# EAGLE board resourciboard - IO (EAGLE 9.6.2)
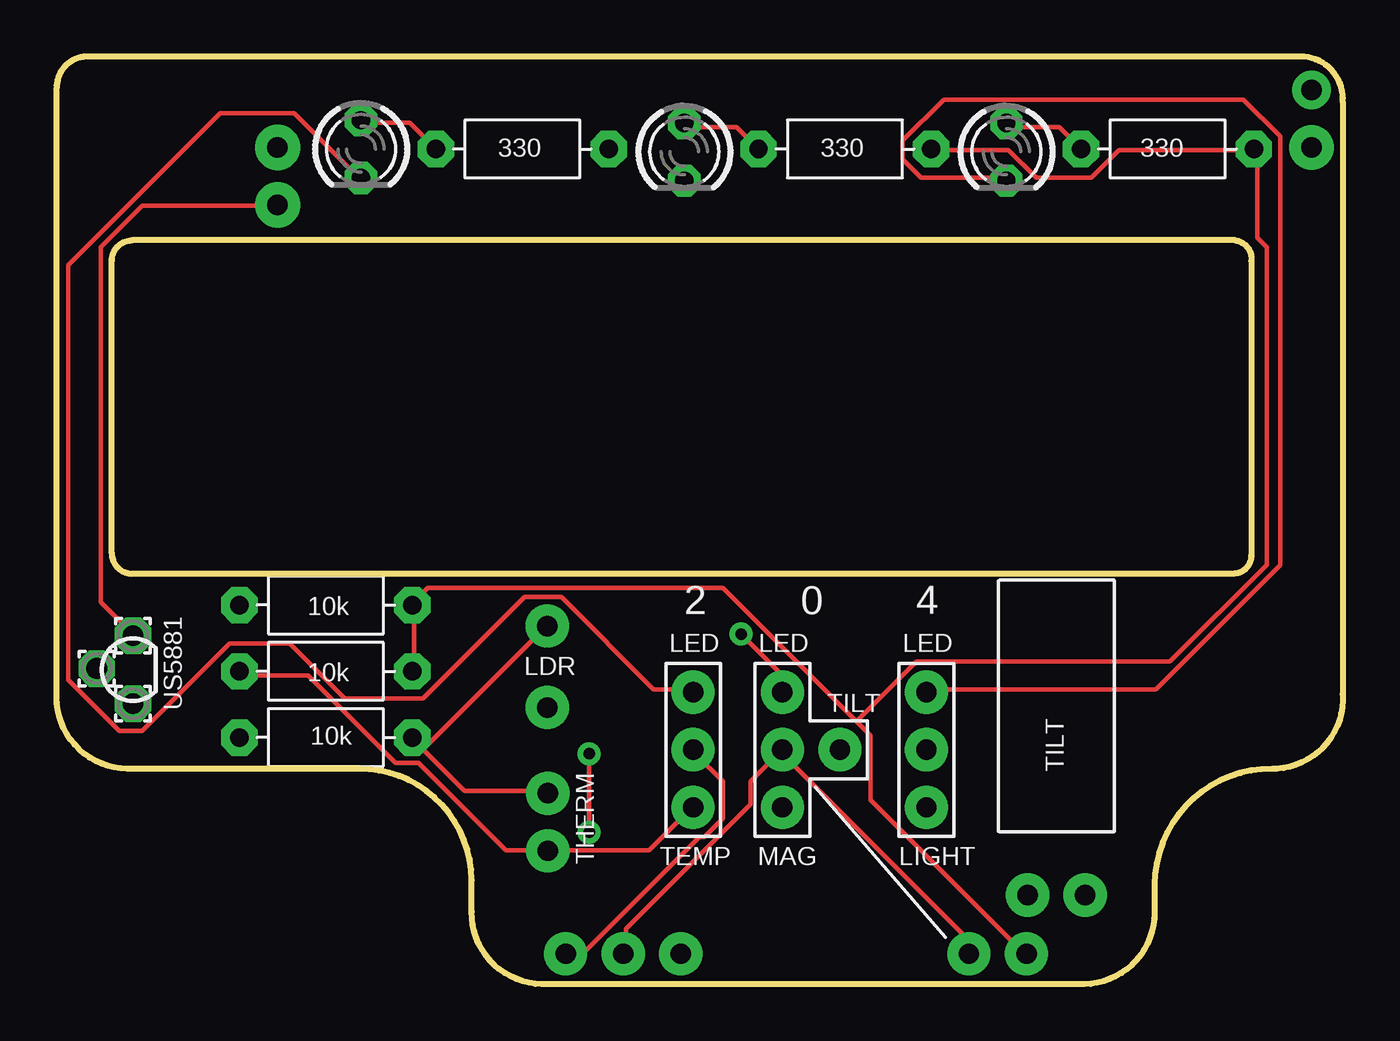
[diagram p0: board, top side]
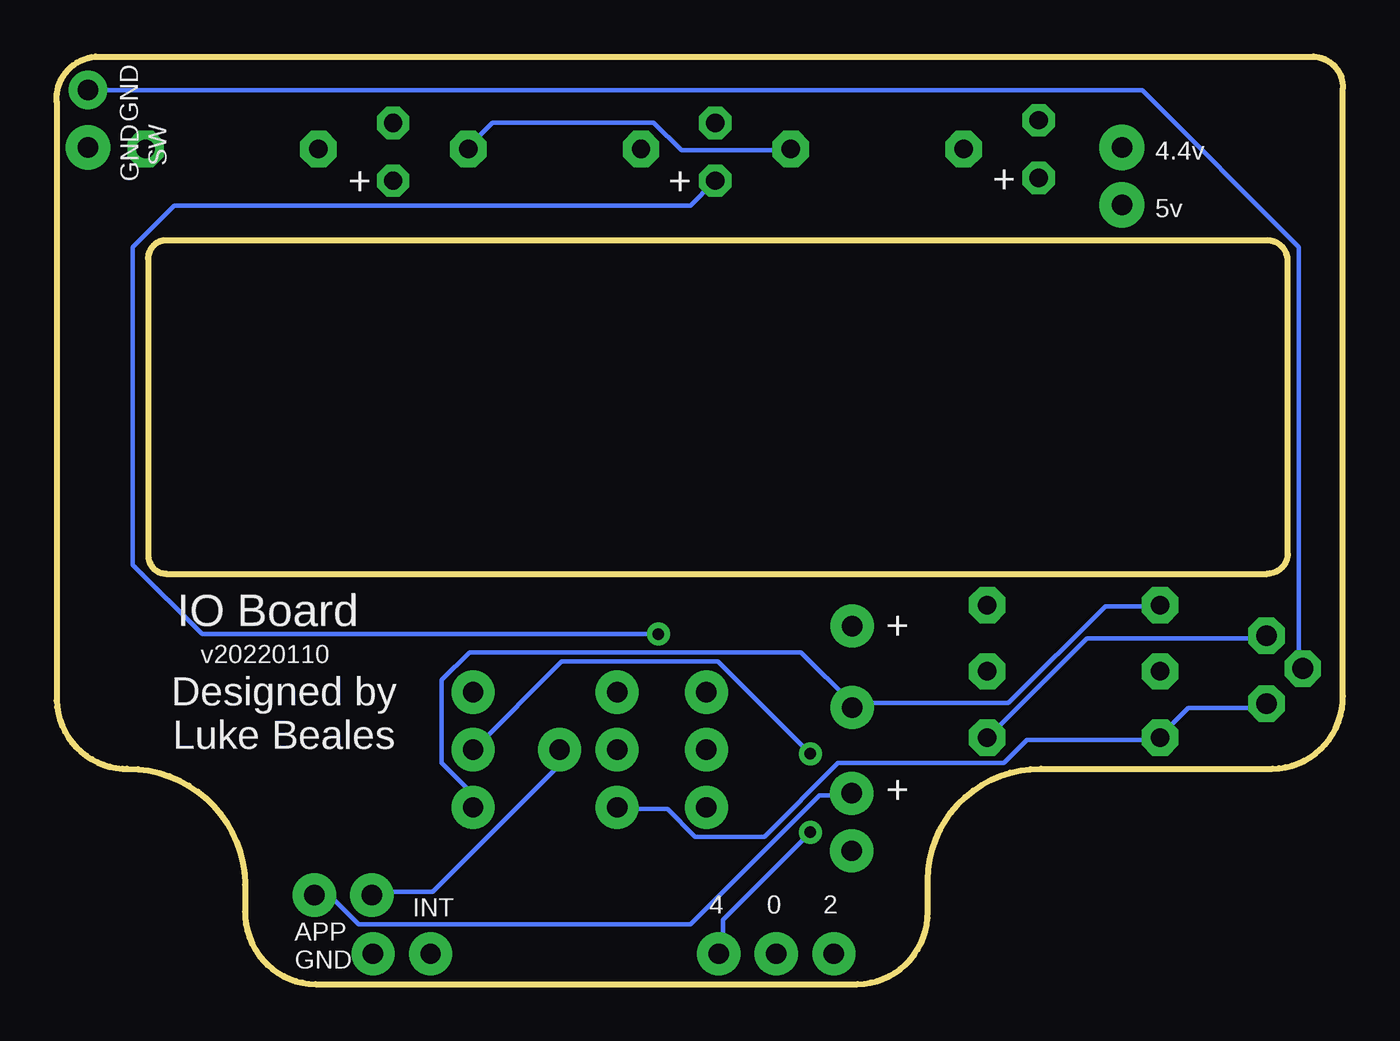
[diagram p1: board, bottom side, seen from below]

Size 56.71 x 40.9 mm. Coordinates in mm from the lower left corner, seen from the top.
Outline: 56.7,38.9 56.7,12.8 arc-90 53.8,9.5 53.6,9.5 arc90 48.4,4.4 48.4,3.2 arc-90 45.3,0 21.4,0 arc-90 18.3,3.2 18.3,4.6 arc90 13.3,9.5 3.1,9.5 arc-90 0,12.7 0,39.5 arc-90 1.3,40.9 55,40.9 arc-90 56.7,38.9
Outline: 51.97,32.8 arc-90 52.67,31.9 52.67,18.9 arc-90 51.87,18.1 3.33,18.1 arc-90 2.43,19 2.43,31.9 arc-90 3.33,32.8 51.97,32.8
Copper layers (1*16): Top 0.035mm / dielectric 1.5mm / Bottom 0.035mm
Design rules "SparkFun": minimum track width 8mil, minimum drill 20mil, track to track 8mil, track to pad 8mil, pad to pad 8mil, via to via 8mil, smd to smd 8mil, copper to edge 10mil, drill to drill 8mil, minimum pad ring 12mil, minimum via ring 10mil, stop-mask expansion 4mil, vias tented up to drill 25mil, thermal gap 10mil

## Footprints (pad centres in the part's own frame; a part is rotated, then mirrored left to right if it is on the bottom)
1,6/0,9 = drill 0.914 pad 1.6 octagon: 1 0,0
R-7,5 = drill 0.813 pad 1.6 octagon: 1 -3.81,0; 2 3.81,0
LED3MM = drill 0.813 octagon: A -1.27,0; K 1.27,0

## Placement (x,y rotation side)
0  [1,6/0,9]  1.76,13.92 180 top  (not fitted)
E$1  [R-7,5]  11.87,10.88 180 top
E$2  [R-7,5]  11.87,13.8 180 top
E$3  [R-7,5]  11.87,16.72 180 top
E$5  [R-7,5]  20.53,36.83 0 top
E$8  [LED3MM]  41.87,36.7 270 top
E$9  [R-7,5]  34.75,36.83 0 top
E$10  [LED3MM]  27.67,36.7 270 top
E$11  [LED3MM]  13.42,36.83 270 top
E$12  [R-7,5]  48.98,36.83 0 top
E$54  [1,6/0,9]  3.37,12.37 180 top  (not fitted)
GND  [1,6/0,9]  3.37,15.37 180 top  (not fitted)

## Library data of the parts
0 E$54 GND = wirepad
E$1-E$3 E$5 E$9 E$12 = discrete
E$8 E$10 E$11 = led

## Nets
5V: E$1.1 GND.1
CPU_GND: E$2.1 E$3.1 E$5.2 E$9.2 E$12.2
GND: 0.1
HALL_DATA: E$1.2 E$54.1
LED_0: E$10.K
LED_2: E$11.K
LED_4: E$8.K
S$1: E$3.2
S$2: E$2.2
S$4: E$5.1 E$11.A
S$14: E$8.A E$12.1
S$19: E$9.1 E$10.A

## Tracks (layer width: path | path; a pad name or v marks a point on that pad's centre or on a via)
0_AND_INT  (via drill 0.9 pad 1.91)
  Top 0.203: v24.98,1.34 25.1,1.42 25.1,2.44 30.59,7.92 30.59,8.94 31.81,10.16 v32,10.34 32.01,10.16 40.14,2.03 40.14,1.42 v40.22,1.34
2  (via drill 0.9 pad 1.91)
  Top 0.203: v22.44,1.34 22.46,1.42 23.27,1.42 28.35,6.5 28.55,6.5 29.37,7.32 29.37,8.94 28.15,10.16 v28.06,10.34
4  (via drill 0.51, 0.9 pad 1.91)
  Top 0.203: v23.47,10.16 v23.47,6.71
  Bottom 0.203: v23.47,6.71 27.34,2.85 27.34,1.42 v27.52,1.34 | v23.47,10.16 27.54,14.22 34.45,14.22 38.31,10.36 v38.35,10.34
4.4V  (via drill 0.9 pad 2)
  other vias: 9.74,36.9
5V  (via drill 0.9 pad 1.91, 0.9 pad 2)
  Top 0.203: v9.74,34.36 9.66,34.34 3.76,34.34 1.93,32.51 1.93,16.87 3.36,15.44 GND.1 | 16.16,10.36 15.75,10.77 E$1.1 16.16,10.36 | 16.16,10.36 17.99,8.53 21.65,8.53 v21.65,8.42 | 16.16,10.36 21.44,15.65 v21.63,15.8
  Bottom 0.203: v45.35,3.93 45.22,3.86 44.61,3.86 43.39,2.64 28.76,2.64 23.07,8.33 21.85,8.33 v21.65,8.42 | GND.1 3.56,15.24 11.28,15.24 15.55,10.97 E$1.1
CPU_GND  (via drill 0.9 pad 1.91)
  Top 0.203: E$9.2 38.71,36.78 41.97,36.78 43.19,35.56 45.62,35.56 46.84,36.78 52.73,36.78 E$12.2 52.94,36.78 52.94,32.92 53.35,32.51 53.35,18.49 49.08,14.22 37.9,14.22 35.26,11.58 | 35.26,11.58 29.37,17.48 16.36,17.48 15.75,16.87 E$3.1 15.75,16.66 15.75,13.82 E$2.1 | 35.26,11.58 35.87,10.97 35.87,8.13 42.58,1.42 v42.76,1.34
  Bottom 0.203: E$5.2 24.49,36.78 29.16,36.78 30.38,38 37.5,38 38.51,36.98 E$9.2
GND  (via drill 0.9 pad 1.7)
  Bottom 0.203: v55.33,39.44 55.17,39.42 8.84,39.42 1.93,32.51 1.93,14.02 0.1
GND_SW  (via drill 0.9 pad 1.96)
  other vias: 55.33,36.9
HALL_DATA  (via drill 0.9 pad 1.91)
  Bottom 0.203: v32,7.8 31.81,7.72 29.77,7.72 28.55,6.5 25.51,6.5 22.25,9.75 14.94,9.75 13.92,10.77 8.23,10.77 E$1.2 8.03,10.97 6.81,12.19 3.56,12.19 E$54.1
LED_0  (via drill 0.51, 0.9 pad 1.91)
  Top 0.203: v30.18,15.44 31.81,13.82 31.81,13.01 v32,12.88
  Bottom 0.203: v30.18,15.44 50.3,15.44 53.35,18.49 53.35,32.51 51.52,34.34 28.76,34.34 27.74,35.36 E$10.K
LED_2  (via drill 0.9 pad 1.91)
  Top 0.203: v28.06,12.88 27.95,13.01 26.32,13.01 22.25,17.07 20.63,17.07 16.16,12.6 12.71,12.6 10.27,15.04 7.62,15.04 3.76,11.18 2.75,11.18 0.51,13.41 0.51,31.7 7.22,38.41 10.47,38.41 13.31,35.56 E$11.K
LED_4  (via drill 0.9 pad 1.91)
  Top 0.203: v38.35,12.88 38.51,13.01 48.47,13.01 53.95,18.49 53.95,37.39 52.33,39.01 39.12,39.01 37.29,37.19 37.29,36.37 38.11,35.56 41.76,35.56 E$8.K
S$1  (via drill 0.9 pad 1.91)
  Bottom 0.203: E$3.2 8.23,16.66 10.47,16.66 14.74,12.39 21.44,12.39 v21.63,12.2 21.65,12.39 23.88,14.63 38.51,14.63 39.73,13.41 39.73,9.75 38.51,8.53 38.51,7.92 v38.35,7.8
S$2  (via drill 0.9 pad 1.91)
  Top 0.203: v28.06,7.8 27.95,7.72 26.12,5.89 21.85,5.89 v21.65,5.88 21.65,5.89 19.82,5.89 15.96,9.75 14.94,9.75 11.08,13.61 8.23,13.61 E$2.2
S$4
  Top 0.203: E$5.1 15.55,38 13.52,38 E$11.A
S$14
  Top 0.203: E$12.1 44.2,37.8 41.97,37.8 E$8.A
S$19
  Top 0.203: E$9.1 29.98,37.8 27.74,37.8 E$10.A
TILT_DATA  (via drill 0.9 pad 1.91)
  Bottom 0.203: v34.54,10.34 34.65,10.16 34.65,9.55 40.14,4.06 42.78,4.06 v42.81,3.93

## Text on the board
tPlace: 330 | 330 | 330 | 10k | US5881 | 2 | 0 | 4 | LED | LED | LED | 10k | LDR | TILT | 10k | TILT | THERM | TEMP | MAG | LIGHT
bPlace: GND | GND / SW | 4.4v | + | + | + | 5v | + | IO Board | v20220110 | Designed by / Luke Beales | + | 2 | 0 | 4 | INT | APP / GND